# EAGLE board K-Board (EAGLE 6.1)
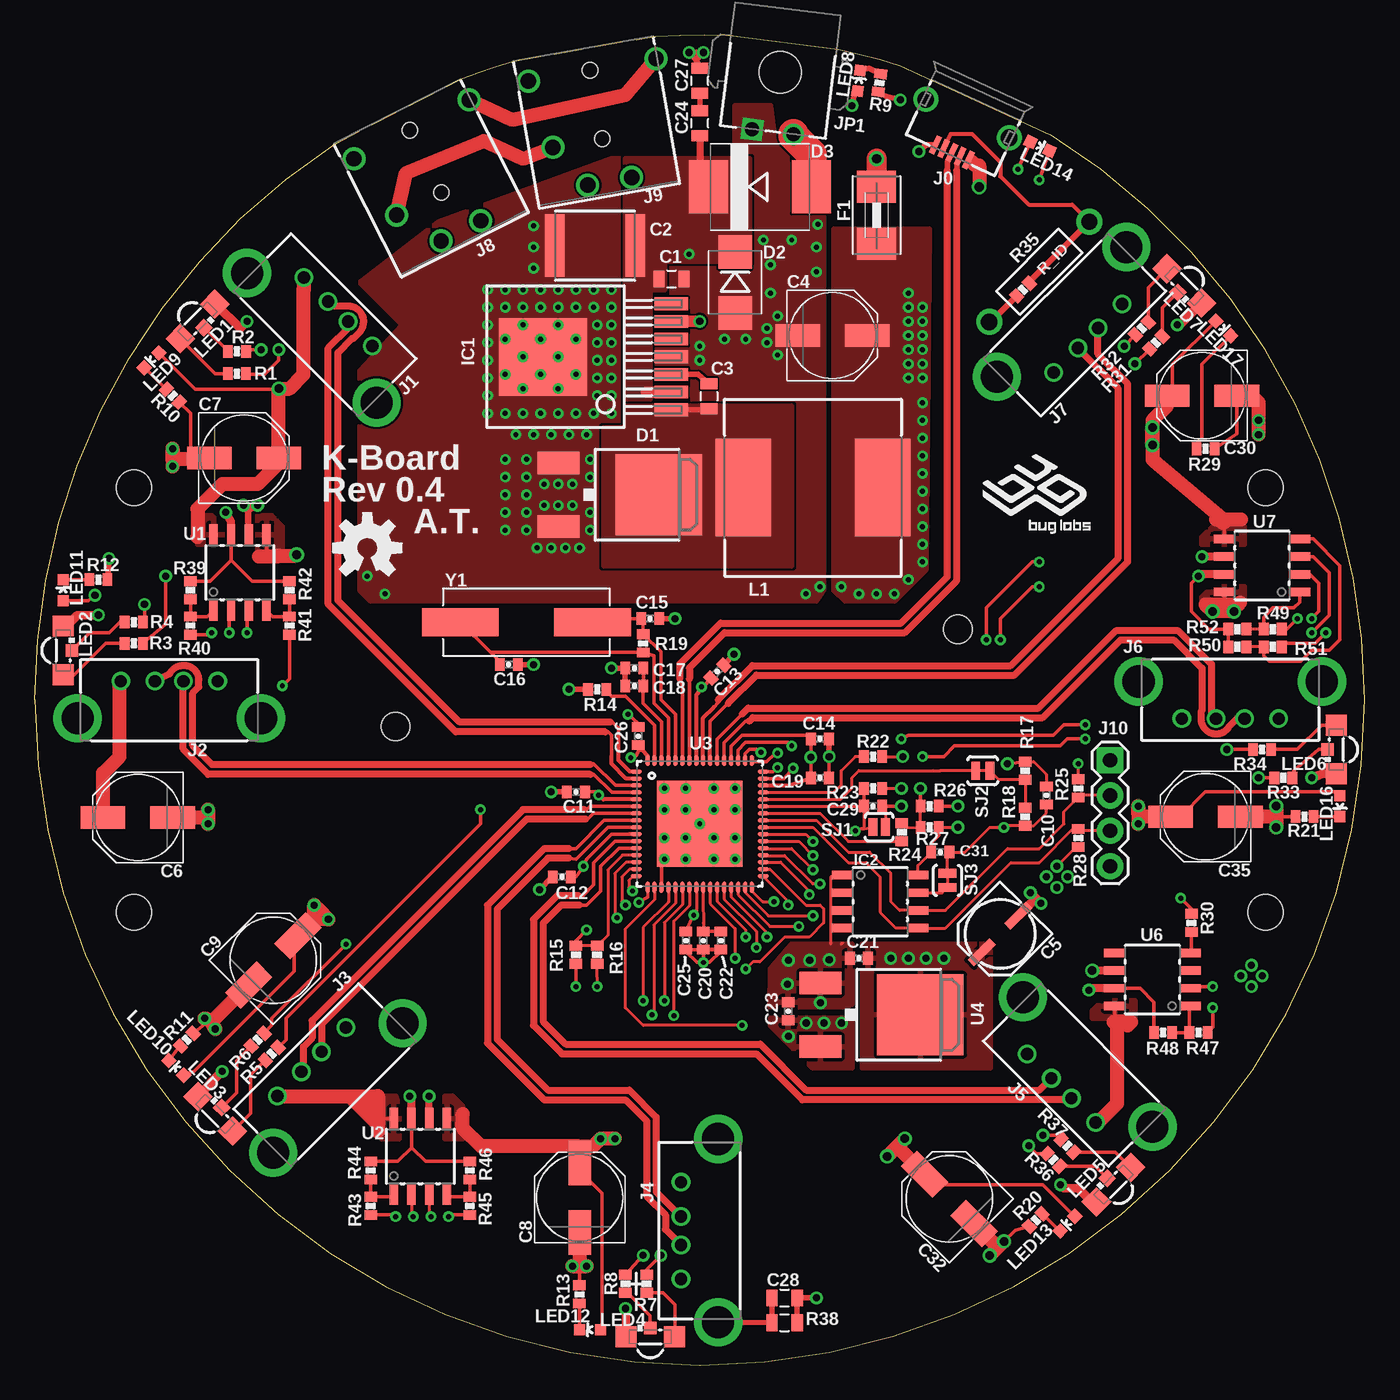
[diagram p0: board, top side]
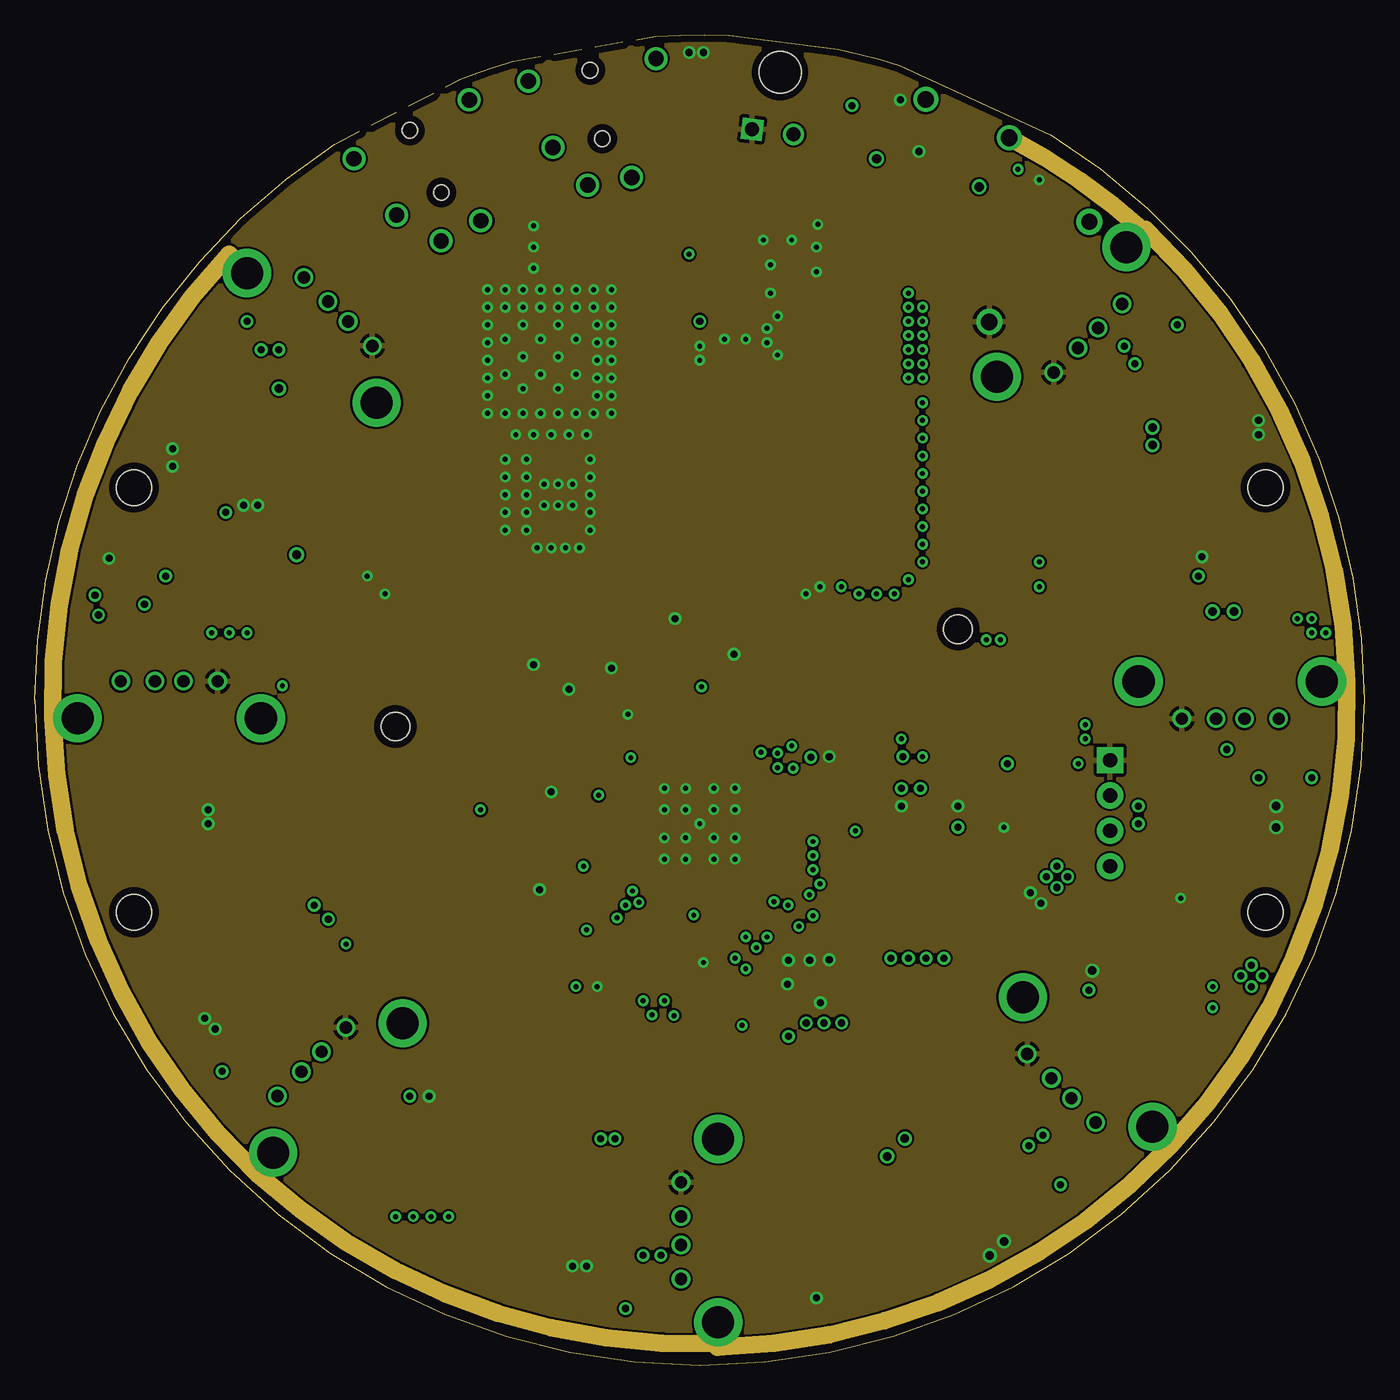
[diagram p1: board, inner layer Route2]
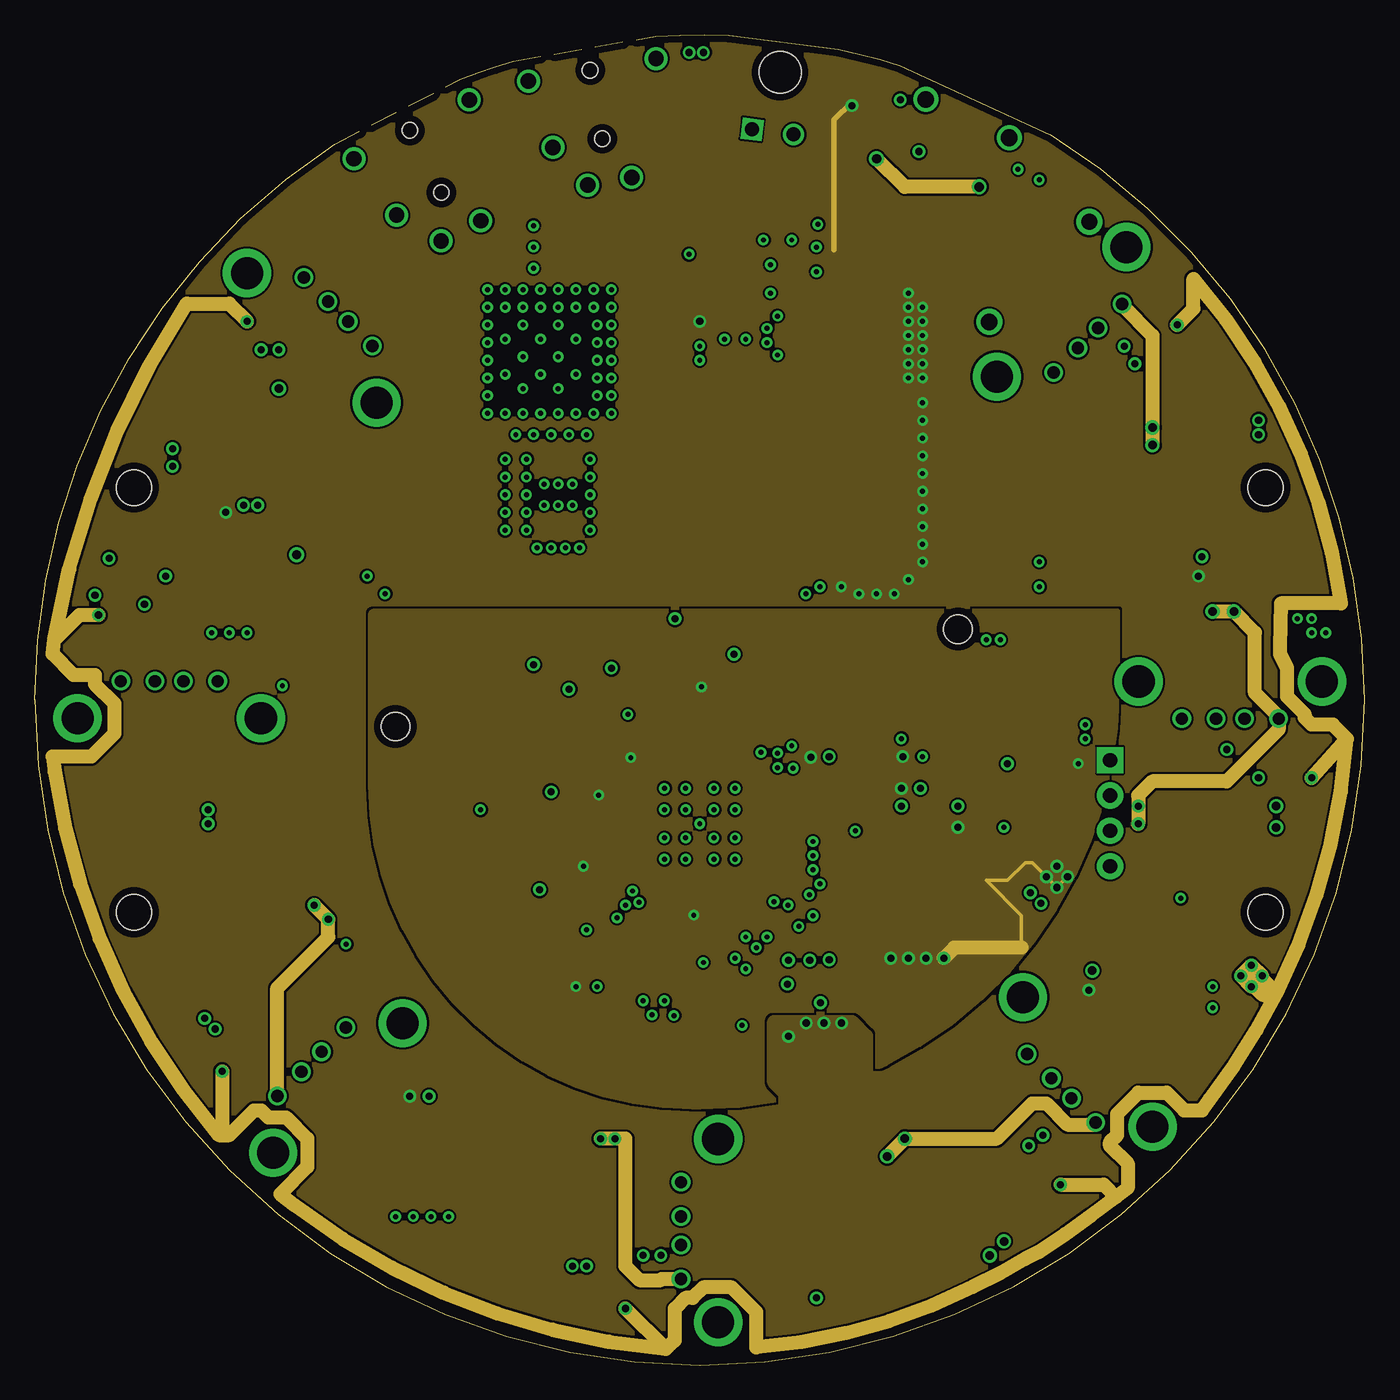
[diagram p2: board, inner layer Route15]
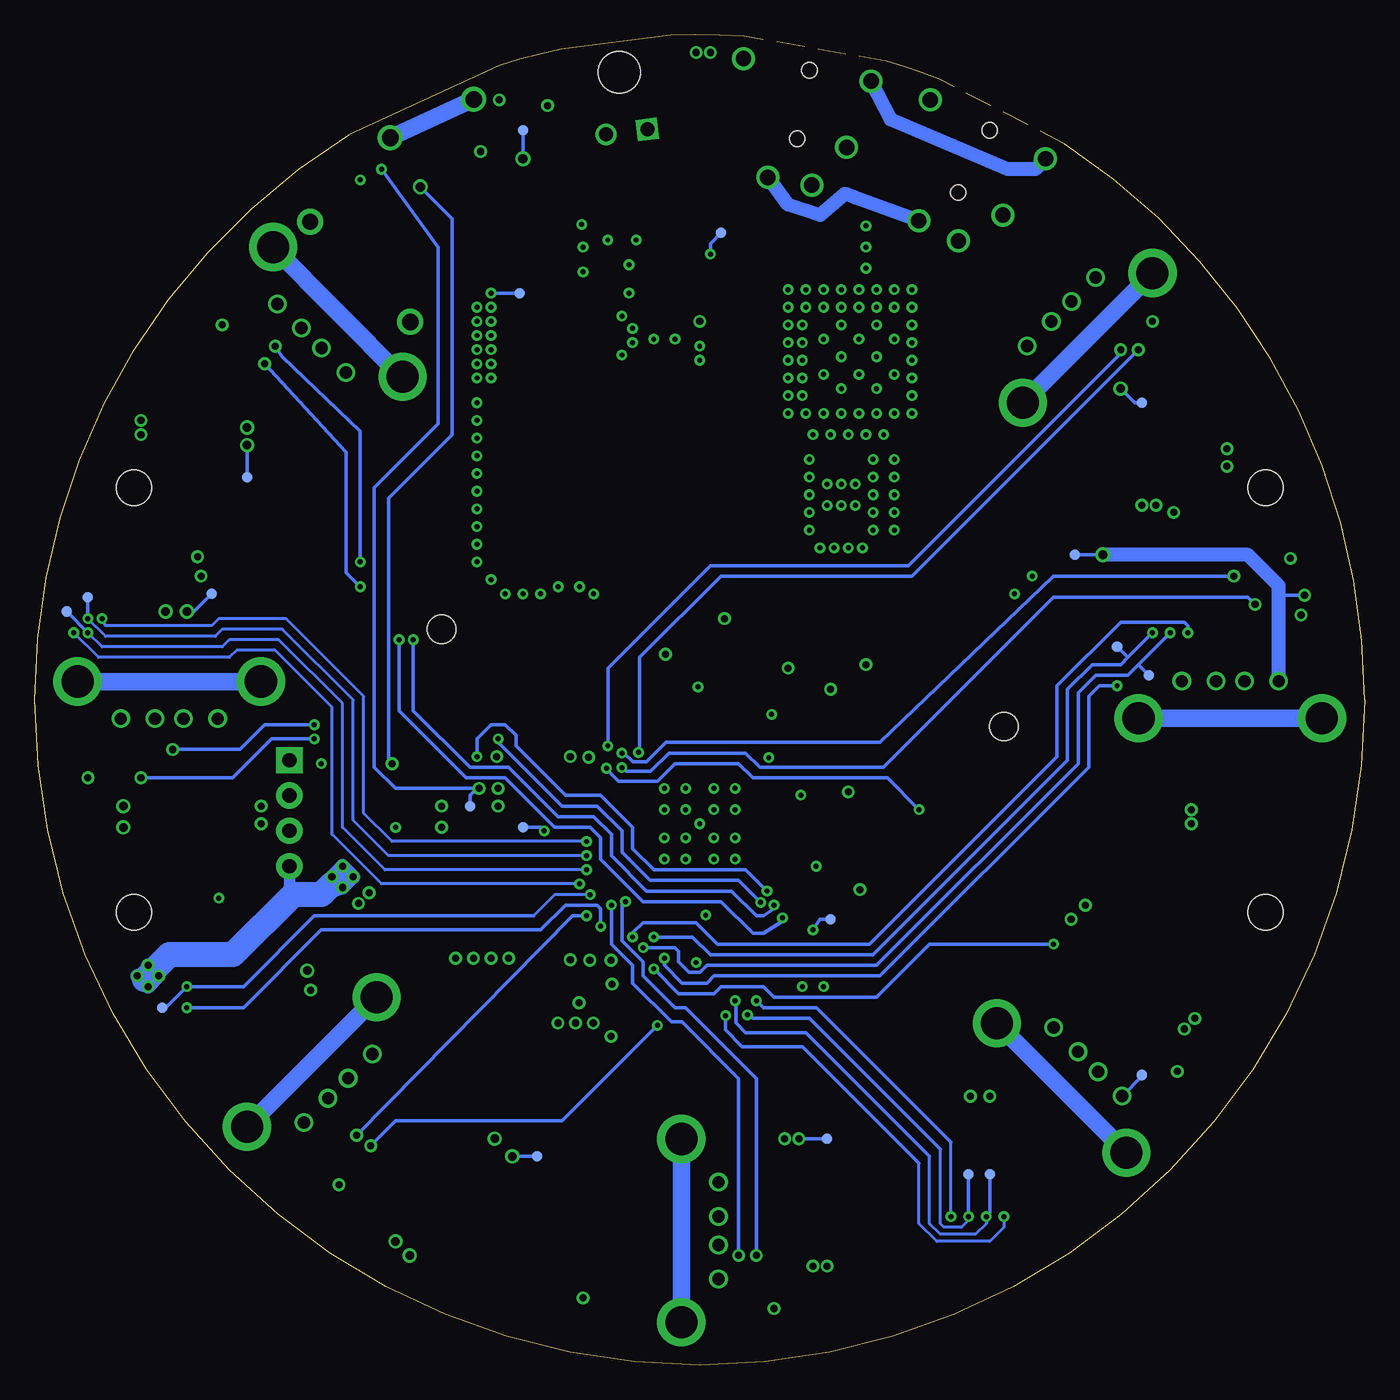
[diagram p3: board, bottom side, seen from below]

Size 95.5 x 95.5 mm. Coordinates in mm from the lower left corner, seen from the top.
Outline: 0,47.75 arc180 95.5,47.75 arc58 72.92,88.34 62.15,93.29 arc6 57.71,94.46 49.84,95.45 arc6 44.58,95.4 34.34,93.6 arc5 30.53,92.3 21.51,87.66 arc57 0,47.75
Copper layers (1+2*15+16): Top 0.0178mm / dielectric 12mil / Route2 0.0356mm / dielectric 28mil / Route15 0.0356mm / dielectric 12mil / Bottom 0.0178mm
Design rules: minimum track width 6mil, minimum drill 8mil, track to track 6mil, track to pad 6mil, pad to pad 6mil, via to via 6mil, smd to smd 6mil, copper to edge 20mil, drill to drill 16mil, minimum pad ring 8mil, minimum via ring 8mil, stop-mask expansion 3mil, vias tented up to drill 0mil, thermal gap 10mil
Holes 2.54 mm at 7.11,62.99 7.11,32.51 88.39,32.51 88.39,62.99
Holes 2.03 mm at 66.29,52.83 25.91,45.85

## Footprints (pad centres in the part's own frame; a part is rotated, then mirrored left to right if it is on the bottom)
0805 = smd 0.8 x 1.2: 1 -0.9,0; 2 0.9,0
2220 = smd 1.4 x 4.5: 1 -2.9,-0.01; 2 2.9,-0.01
PANASONIC_D = smd 3.2 x 1.6: + 2.5,0; - -2.5,0
PANASONIC_C = smd 2.2 x 0.65: + 1.9,-0.2; - -1.8,-0.2
0402-CAP = smd 0.7 x 0.9: 1 -0.65,0; 2 0.65,0
V-REG_DPACK = smd 1.6 x 3: 1 -2.28,-4.8; 3 2.28,-4.8 | smd 5.8 x 6.2: 4 0,2.38
SMB-DIODE = smd 2.4 x 2.4: A 2.2,0; C -2.2,0
SMC = smd 2.8 x 3.8: A 3.7,0; C -3.7,0
1812 = smd 2.286 x 2.794: 1 -2.046,0; 2 2.046,0
TO-263 = smd 0.91 x 2.41: 1 -3.81,0; 2 -2.54,0; 3 -1.27,0; 4 0,0; 5 1.27,0; 6 2.54,0; 7 3.81,0 | smd 5.59 x 6.35: PAD -0.02,9.22
SOIC8 = smd 0.6 x 1.55: 1 -1.905,-2.7; 2 -0.635,-2.7; 3 0.635,-2.7; 4 1.905,-2.7; 5 1.905,2.7; 6 0.635,2.7; 7 -0.635,2.7; 8 -1.905,2.7
10118193 = smd 0.4 x 1.35: 1 -1.3,2.675; 2 -0.65,2.675; 3 0,2.675; 4 0.65,2.675; 5 1.3,2.675 | drill 1.2: S1 -3.3,0; S2 3.3,0
USB-A-TH-VERT = drill 0.889: D+ 1.016,1.346; D- -1.016,1.346; GND 3.48,1.346; VBUS -3.48,1.346 | drill 2.311: S1 -6.579,-1.321; S2 6.579,-1.321
SJ-4351X = drill 1.1: 1 0,4.8; 2 5,-3.6; 3 8.1,1.6; 4 0,-4.5; 5 8.1,-1.6 | hole 1.1: 0,0; 5,0
1X04 = drill 1.016 pad 1.88 square: 1 0,0 | drill 1.016 pad 1.88: 2 2.54,0; 3 5.08,0; 4 7.62,0
2-1445055-2 = drill 1.016 square: 1 1.499,2.159 | drill 1.016: 2 -1.499,2.159 | hole 2.997: 0,-2.159
SRR1208 = smd 4 x 7: 1 -5,0; 2 5,0
LED_DUAL_3MMX1MM = smd 1.5 x 1.5: 1 -1.75,0; 3 1.75,0 | smd 0.9 x 0.9: 2 0,0.65
LED-0603 = smd 0.8 x 0.8: A 0,-0.75; C 0,0.75
0402-RES = smd 0.7 x 0.9: 1 -0.65,0; 2 0.65,0
AXIAL-0.4 = drill 1.168 pad 1.88: P$1 -5.08,0; P$2 5.08,0
SJ_2S-NO = smd 0.635 x 1.27: 1 -0.45,0; 2 0.45,0
SJ_2S-TRACE = smd 0.635 x 1.27: 1 -0.508,0; 2 0.508,0
PAD.03X.03 = smd 0.762 x 0.762: P$1 0,0
QFN-64-PAD = smd 0.8 x 0.28: 1 -4.55,3.75; 2 -4.55,3.25; 3 -4.55,2.75; 4 -4.55,2.25; 5 -4.55,1.75; 6 -4.55,1.25; 7 -4.55,0.75; 8 -4.55,0.25; 9 -4.55,-0.25; 10 -4.55,-0.75; 11 -4.55,-1.25; 12 -4.55,-1.75; 13 -4.55,-2.25; 14 -4.55,-2.75; 15 -4.55,-3.25; 16 -4.55,-3.75; 33 4.55,-3.75; 34 4.55,-3.25; 35 4.55,-2.75; 36 4.55,-2.25; 37 4.55,-1.75; 38 4.55,-1.25; 39 4.55,-0.75; 40 4.55,-0.25; 41 4.55,0.25; 42 4.55,0.75; 43 4.55,1.25; 44 4.55,1.75; 45 4.55,2.25; 46 4.55,2.75; 47 4.55,3.25; 48 4.55,3.75 | smd 0.28 x 0.8: 17 -3.75,-4.55; 18 -3.25,-4.55; 19 -2.75,-4.55; 20 -2.25,-4.55; 21 -1.75,-4.55; 22 -1.25,-4.55; 23 -0.75,-4.55; 24 -0.25,-4.55; 25 0.25,-4.55; 26 0.75,-4.55; 27 1.25,-4.55; 28 1.75,-4.55; 29 2.25,-4.55; 30 2.75,-4.55; 31 3.25,-4.55; 32 3.75,-4.55; 49 3.75,4.55; 50 3.25,4.55; 51 2.75,4.55; 52 2.25,4.55; 53 1.75,4.55; 54 1.25,4.55; 55 0.75,4.55; 56 0.25,4.55; 57 -0.25,4.55; 58 -0.75,4.55; 59 -1.25,4.55; 60 -1.75,4.55; 61 -2.25,4.55; 62 -2.75,4.55; 63 -3.25,4.55; 64 -3.75,4.55 | smd 6.15 x 6.15: P$1 0,0
HC49USX = smd 5.5 x 2: P$1 4.75,0; P$2 -4.75,0

## Placement (x,y rotation side)
C1  GRM21BR71H105KA  [0805]  45.72,77.98 0 top
C2  C5750X7S2A106M  [2220]  40.23,80.37 180 top
C3  C0805C103K5RACTU  [0805]  48.41,69.55 270 top
C4  150u  [PANASONIC_D]  57.28,73.91 0 top
C5  33u  [PANASONIC_C]  69.49,30.84 225 top
C6  100u  [PANASONIC_D]  7.4,39.32 180 top
C7  100u  [PANASONIC_D]  15.03,65.12 0 top
C8  100u  [PANASONIC_D]  39.13,12.02 90 top
C9  100u  [PANASONIC_D]  17.12,29.06 45 top
C10  0.1  [0402-CAP]  72.64,40.89 90 top
C11  0.1  [0402-CAP]  38.86,41.15 180 top
C12  0.1  [0402-CAP]  37.85,35.05 180 top
C13  0.1  [0402-CAP]  49.02,49.78 45 top
C14  0.1  [0402-CAP]  56.39,44.96 0 top
C15  18p  [0402-CAP]  44.2,53.59 0 top
C16  18p  [0402-CAP]  34.04,50.29 180 top
C17  1  [0402-CAP]  43.05,50.04 180 top
C18  0.1  [0402-CAP]  43.05,48.77 180 top
C19  0.1  [0402-CAP]  56.39,42.16 0 top
C20  0.1  [0402-CAP]  48.01,30.48 270 top
C21  22n  [0402-CAP]  59.18,29.21 180 top
C22  1  [0402-CAP]  49.28,30.48 270 top
C23  0.1  [0402-CAP]  54.1,25.4 270 top
C24  0.47u  [0805]  47.75,89.15 90 top
C25  0.1  [0402-CAP]  46.76,30.48 270 top
C26  0.1  [0402-CAP]  43.33,45.16 90 top
C27  0.47  [0805]  47.75,92.2 90 top
C28  4.7n  [0805]  53.85,4.83 0 top
C29  0.1  [0402-CAP]  60.2,40.13 0 top
C30  100u  [PANASONIC_D]  83.82,69.6 180 top
C31  0.1  [0402-CAP]  65.02,36.83 0 top
C32  100u  [PANASONIC_D]  65.68,11.94 135 top
C35  100u  [PANASONIC_D]  84.07,39.37 180 top
D1  50WQ10FNPBF  [V-REG_DPACK]  42.42,62.48 270 top
D2  SMBJ36CA  [SMB-DIODE]  50.29,77.72 270 top
D3  MBRS540T3G  [SMC]  52.07,84.58 0 top
DRILEGEND  [DRILEGEND]  118.67,39.52 0 top  (outside the outline)
F1  MF-MSMF110/16-2  [1812]  60.45,82.55 270 top
IC1  LM22678  [TO-263]  45.72,72.39 90 top
IC2  ATMEL-AT24C02B-SS  [SOIC8]  60.71,33.27 270 top
J0  USB_MINIB_SHIELD-10118193  [10118193]  66.98,89.49 155.3 top
J1  USB-A-S-RA-VERT  [USB-A-TH-VERT]  20.83,74.68 315 top
J2  USB-A-S-RA-VERT  [USB-A-TH-VERT]  9.65,47.75 0 top
J3  USB-A-S-RA-VERT  [USB-A-TH-VERT]  20.83,20.83 45 top
J4  USB-A-S-RA-VERT  [USB-A-TH-VERT]  47.75,9.65 90 top
J5  USB-A-S-RA-VERT  [USB-A-TH-VERT]  74.68,20.83 135 top
J6  USB-A-S-RA-VERT  [USB-A-TH-VERT]  85.85,47.75 180 top
J7  USB-A-S-RA-VERT  [USB-A-TH-VERT]  74.68,74.68 225 top
J8  Audio INPUT  [SJ-4351X]  26.92,88.65 297 top
J9  Audio OUTPUT  [SJ-4351X]  39.88,92.96 280 top
J10  IIC  [1X04]  77.22,43.43 270 top
JP1  Power  [2-1445055-2]  53.26,90.68 173 top
L1  SRR1208-6R5ML  [SRR1208]  55.88,62.99 0 top
LED1  LED_2X_COMMON_ANODE  [LED_DUAL_3MMX1MM]  11.68,74.93 225 top
LED2  LED_2X_COMMON_ANODE  [LED_DUAL_3MMX1MM]  2.03,51.31 270 top
LED3  LED_2X_COMMON_ANODE  [LED_DUAL_3MMX1MM]  12.95,18.03 315 top
LED4  LED_2X_COMMON_ANODE  [LED_DUAL_3MMX1MM]  44.2,2.03 0 top
LED5  LED_2X_COMMON_ANODE  [LED_DUAL_3MMX1MM]  77.47,12.95 45 top
LED6  LED_2X_COMMON_ANODE  [LED_DUAL_3MMX1MM]  93.47,44.2 90 top
LED7  LED_2X_COMMON_ANODE  [LED_DUAL_3MMX1MM]  82.55,77.47 135 top
LED8  [LED-0603]  59.18,92.2 352 top
LED9  [LED-0603]  8.38,72.14 135 top
LED10  [LED-0603]  10.16,21.34 45 top
LED11  [LED-0603]  2.03,55.63 0 top
LED12  [LED-0603]  39.88,2.54 90 top
LED13  [LED-0603]  74.17,10.16 135 top
LED14  [LED-0603]  72.19,87.5 245 top
LED16  [LED-0603]  93.73,40.13 180 top
LED17  [LED-0603]  85.34,74.42 225 top
R1  110  [0402-RES]  14.51,71.17 180 top
R2  110  [0402-RES]  14.52,72.77 0 top
R3  110  [0402-RES]  7.11,51.82 180 top
R4  110  [0402-RES]  7.11,53.34 0 top
R5  110  [0402-RES]  17.02,22.35 225 top
R6  110  [0402-RES]  16,23.37 45 top
R7  110  [0402-RES]  43.94,5.84 270 top
R8  110  [0402-RES]  42.42,5.84 90 top
R9  330  [0402-RES]  60.66,92.05 262 top
R10  330  [0402-RES]  9.91,69.6 315 top
R11  330  [0402-RES]  10.92,23.37 45 top
R12  330  [0402-RES]  4.57,56.39 0 top
R13  330  [0402-RES]  39.12,5.08 90 top
R14  12k-1%  [0402-RES]  40.39,48.51 180 top
R15  10k  [0402-RES]  38.86,29.46 270 top
R16  DNP  [0402-RES]  40.39,29.46 90 top
R17  100k  [0402-RES]  71.12,42.67 270 top
R18  100k  [0402-RES]  71.12,39.37 90 top
R19  1M  [0402-RES]  43.69,51.82 90 top
R20  330  [0402-RES]  71.88,10.41 225 top
R21  330  [0402-RES]  91.19,39.37 180 top
R22  10k  [0402-RES]  60.2,43.69 180 top
R23  100k  [0402-RES]  60.2,41.4 180 top
R24  330  [0402-RES]  62.26,38.25 270 top
R25  10k  [0402-RES]  74.93,41.4 90 top
R26  100k  [0402-RES]  64.26,40.13 180 top
R27  DNP  [0402-RES]  64.26,38.61 0 top
R28  10k  [0402-RES]  74.93,37.85 270 top
R29  330  [0402-RES]  84.07,65.79 0 top
R30  10k  [0402-RES]  83.06,31.75 270 top
R31  110  [0402-RES]  80.52,73.41 225 top
R32  110  [0402-RES]  79.5,74.42 45 top
R33  110  [0402-RES]  89.66,42.16 180 top
R34  110  [0402-RES]  88.14,44.2 0 top
R35  124k  [0402-RES]  70.97,77.22 225 top
R35B  R_ID  [AXIAL-0.4]  72.14,78.49 225 top
R36  110  [0402-RES]  73.15,14.73 135 top
R37  110  [0402-RES]  74.17,15.75 315 top
R38  1M  [0805]  53.85,3.05 0 top
R39  0  [0402-RES]  11.18,55.63 90 top
R40  DNP  [0402-RES]  11.18,53.09 270 top
R41  DNP  [0402-RES]  18.29,53.09 90 top
R42  0  [0402-RES]  18.29,55.63 270 top
R43  DNP  [0402-RES]  24.13,11.43 270 top
R44  0  [0402-RES]  24.13,13.97 90 top
R45  DNP  [0402-RES]  31.24,11.43 90 top
R46  0  [0402-RES]  31.24,13.97 270 top
R47  DNP  [0402-RES]  83.57,23.88 0 top
R48  0  [0402-RES]  81.03,23.88 180 top
R49  DNP  [0402-RES]  88.9,52.83 0 top
R50  0  [0402-RES]  86.36,52.83 180 top
R51  DNP  [0402-RES]  88.9,51.56 180 top
R52  0  [0402-RES]  86.36,51.56 0 top
SJ1  OPEN  [SJ_2S-NO]  60.64,38.62 180 top
SJ2  CLOSED  [SJ_2S-TRACE]  68.07,42.67 180 top
SJ3  CLOSED  [SJ_2S-TRACE]  65.53,34.8 270 top
SYM1  [OSHW-LOGO-M]  23.88,58.67 0 top
SYM2  [BUG_LOGO_SM]  68.07,59.69 0 top
TP1  RESET  [PAD.03X.03]  60.45,38.61 0 bottom
TP2  +5V  [PAD.03X.03]  60.71,76.96 0 bottom
TP3  +12V  [PAD.03X.03]  46.23,81.28 0 bottom
TP4  VBUS  [PAD.03X.03]  60.45,88.65 0 bottom
TP5  CFG1  [PAD.03X.03]  64.26,40.13 0 bottom
TP6  CFG2  [PAD.03X.03]  38.35,32 0 bottom
TP7  ERR0  [PAD.03X.03]  15.49,49.53 0 bottom
TP8  PWR0  [PAD.03X.03]  16,69.09 0 bottom
TP9  ERR1  [PAD.03X.03]  17.78,51.56 0 bottom
TP10  PWR1  [PAD.03X.03]  20.83,58.17 0 bottom
TP11  ERR2  [PAD.03X.03]  26.92,13.72 90 bottom
TP12  ERR3  [PAD.03X.03]  28.45,13.72 90 bottom
TP13  PWR2  [PAD.03X.03]  16,20.83 90 bottom
TP14  PWR3  [PAD.03X.03]  38.61,16.26 90 bottom
TP15  ERR4  [PAD.03X.03]  86.36,25.65 0 bottom
TP16  PWR4  [PAD.03X.03]  59.44,14.99 0 bottom
TP17  ERR5  [PAD.03X.03]  91.69,55.12 0 bottom
TP18  ERR6  [PAD.03X.03]  93.22,54.1 0 bottom
TP19  PWR5  [PAD.03X.03]  82.8,55.37 0 bottom
TP20  PWR6  [PAD.03X.03]  80.26,63.75 0 bottom
U1  [SOIC8]  14.73,56.9 0 top
U2  [SOIC8]  27.69,14.99 0 top
U3  USB2517  [QFN-64-PAD]  47.75,38.86 0 top
U4  TLE4284DV33  [V-REG_DPACK]  61.21,25.15 270 top
U6  [SOIC8]  80.26,27.69 90 top
U7  [SOIC8]  88.14,57.4 90 top
U$9  [A4L-LOC]  -26.87,-32.11 0 top  (outside the outline)
Y1  24M  [HC49USX]  35.31,53.34 0 top

## Library data of the parts
C1-C32 C35 D1 D2 IC1 IC2 J0 J1-J9 JP1 L1 LED1-LED14 LED16 LED17 R1-R35 R35B R36-R52 SYM2 TP1-TP20 U1-U4 U6 U7 Y1 = BUG
D3 = SparkFun-DiscreteSemi
DRILEGEND = drilegend
F1 = adafruit
J10 = SparkFun-Connectors
SJ1-SJ3 = SparkFun-Passives
SYM1 = SparkFun-Aesthetics
U$9 = frames

## Nets
3.3V: C5.+ C11.1 C12.1 C13.1 C14.1 C19.1 C21.1 C25.1 C26.1 C31.1 IC2.8 J10.4 LED1.1 LED2.1 LED3.1 LED4.1 LED5.1 LED6.1 LED7.1 R15.2 R22.1 R23.1 R25.2 R27.2 R28.2 U3.5 U3.10 U3.24 U3.46 U3.52 U3.57 U3.64 U4.4
5V: C4.+ C23.2 F1.2 IC1.6 L1.2 LED8.A R39.2 R42.1 R44.2 R46.1 R48.2 R50.2 R52.1 TP2.P$1 U1.7 U2.7 U4.3 U6.7 U7.7
+12V: C1.1 C2.1 C24.1 D2.C D3.C IC1.2 TP3.P$1
ENB3: R45.2 R46.2 U2.4
ENB6: R51.2 R52.2 U7.4
GND: C1.2 C2.2 C4.- C5.- C6.- C7.- C8.- C9.- C10.1 C11.2 C12.2 C13.2 C14.2 C15.2 C16.1 C17.2 C18.2 C19.2 C20.2 C21.2 C22.2 C23.1 C25.2 C26.2 C27.2 C28.2 C29.2 C30.- C31.2 C32.- C35.- D1.1 D1.3 D2.A IC1.4 IC1.PAD IC2.1 IC2.2 IC2.3 IC2.4 J0.5 J1.GND J2.GND J3.GND J4.GND J5.GND J6.GND J7.GND J10.1 JP1.1 LED14.C R9.2 R10.2 R11.2 R12.2 R13.2 R14.2 R16.1 R18.1 R20.2 R21.2 R26.1 R29.2 R30.1 R35.2 R35B.P$2 R38.2 SJ1.1 SJ3.1 U1.6 U2.6 U3.19 U3.P$1 U4.1 U6.6 U7.6
J7: J7.D+ U3.56
N$1: C20.1 C22.1 U3.25
N$2: R22.2 U3.45
N$3: C17.1 C18.1 U3.62
N$4: C29.1 R23.2 SJ1.2 TP1.P$1 U3.43
N$5: C15.1 R19.2 U3.60 Y1.P$1
N$6: C16.2 R19.1 U3.61 Y1.P$2
N$7: R30.2 U6.4
N$8: R17.2 R18.2 SJ2.1
N$9: J1.D- U3.1
N$10: SJ2.2 U3.44
N$11: C10.2 F1.1 J0.1 R17.1 TP4.P$1
N$12: R14.1 U3.63
N$13: J1.D+ U3.2
N$14: R2.2 U3.50
N$15: R1.1 U3.51
N$16: LED1.3 R1.2
N$17: LED1.2 R2.1
N$18: TP7.P$1 U1.2 U3.28
N$19: R40.2 U3.29
N$20: C7.+ J1.VBUS LED9.A TP8.P$1 U1.8
N$21: R41.1 U3.26
N$22: TP9.P$1 U1.3 U3.27
N$23: J2.D- U3.3
N$24: J2.D+ U3.4
N$25: C6.+ J2.VBUS LED11.A TP10.P$1 U1.5
N$26: LED2.3 R3.2
N$27: R4.2 U3.48
N$28: R3.1 U3.49
N$29: LED2.2 R4.1
N$30: J6.D- U3.53
N$31: J3.D- U3.6
N$32: J3.D+ U3.7
N$33: R6.2 U3.34
N$34: R5.1 U3.47
N$35: LED3.3 R5.2
N$36: LED3.2 R6.1
N$37: LED11.C R12.1
N$38: J4.D- U3.8
N$39: J4.D+ U3.9
N$40: C8.+ J4.VBUS LED12.A TP14.P$1 U2.5
N$41: LED4.3 R7.2
N$42: R8.2 U3.32
N$43: R7.1 U3.33
N$44: LED4.2 R8.1
N$45: TP11.P$1 U2.2 U3.22
N$46: R43.2 U3.23
N$47: D3.A JP1.2
N$48: TP12.P$1 U2.3 U3.21
N$49: J5.D- U3.11
N$50: J5.D+ U3.12
N$51: R36.2 U3.18
N$52: R37.1 U3.31
N$53: LED5.3 R37.2
N$54: LED5.2 R36.1
N$55: C32.+ J5.VBUS LED13.A TP16.P$1 U6.8
N$56: J6.D+ U3.54
N$57: R33.2 U3.16
N$58: R34.1 U3.17
N$59: LED6.3 R34.2
N$60: LED6.2 R33.1
N$61: C35.+ J6.VBUS LED16.A TP19.P$1 U7.8
N$62: J7.D- U3.55
N$63: J8.3 J9.3
N$64: C30.+ J7.VBUS LED17.A TP20.P$1 U7.5
N$65: LED7.3 R32.2
N$66: R31.2 U3.14
N$67: R32.1 U3.15
N$68: LED7.2 R31.1
N$69: TP15.P$1 U3.35 U6.2
N$70: R47.2 U3.30
N$71: TP17.P$1 U3.38 U7.2
N$72: R49.2 U3.39
N$74: TP18.P$1 U3.37 U7.3
N$75: R15.1 R16.2 TP6.P$1 U3.13
N$76: LED14.A R24.1 R26.2 R27.1 TP5.P$1
N$77: R24.2 U3.42
N$78: IC2.6 J10.2 R25.1 U3.41
N$79: IC2.5 J10.3 R28.1 U3.40
N$80: J8.2 J9.2
N$81: R39.1 R40.1 U1.1
N$82: C3.1 IC1.3
N$83: J8.4 J9.4
N$84: J8.1 J9.1
N$85: LED8.C R9.1
N$86: LED9.C R10.1
N$87: C9.+ J3.VBUS LED10.A TP13.P$1 U2.8
N$88: LED10.C R11.1
N$89: C24.2 C27.1
N$90: LED12.C R13.1
N$91: LED17.C R29.1
N$92: LED16.C R21.1
N$93: LED13.C R20.1
N$94: J0.4 R35.1 R35B.P$1
N$95: R41.2 R42.2 U1.4
N$96: R43.1 R44.1 U2.1
N$97: R45.1 U3.20
N$98: R47.1 R48.1 U6.1
N$99: R49.1 R50.1 U7.1
N$100: R51.1 U3.36
N$101: IC2.7 SJ3.2
PE: C28.1 J0.S1 J0.S2 J1.S1 J1.S2 J2.S1 J2.S2 J3.S1 J3.S2 J4.S1 J4.S2 J5.S1 J5.S2 J6.S1 J6.S2 J7.S1 J7.S2 R38.1
SW: C3.2 D1.4 IC1.1 L1.1
UP_DM: J0.2 U3.58
UP_DP: J0.3 U3.59

## Tracks (layer width: path | path; a pad name or v marks a point on that pad's centre or on a via)
3.3V  (via drill 0.36, 0.51)
  Top 0.203: U3.24 47.5,32.51 | 47.17,32.09 C25.1 v47.32,32.31 | R22.1 v62.33,43.69 | R23.1 v62.23,41.4 | v66.29,38.61 R27.2 64.91,37.99 64.37,37.45 C31.1 63.41,35.86 IC2.8 | R25.2 v74.93,43.18 | R28.2 74.79,37.2 v73.41,35.81
  Top 0.254: 40.81,40.61 40.27,41.15 C11.1 | 42.68,38.11 42.67,38.1 41.4,38.1 39.62,36.32 v39.4,35.81 38.86,35.05 C12.1 38.61,35.05 | U3.52 50,44.41 50.8,45.21 55.48,45.21 C14.1 55.73,44.95 v55.73,43.64 55.74,43.63 C19.1 | 47.5,32.51 47.17,32.09 | U3.64 44,43.76 43.61,44.15 43.38,44.15 43.18,43.76 v42.8,43.61 | U3.5 40.8,40.61 v40.49,40.92 | R15.2 v38.86,27.18 | 47.5,48.11 v47.88,48.69
  Top 0.279: U3.5 40.81,40.61 | U3.46 54.17,41.61 C19.1 | U3.57 47.5,48.11 C13.1 | U3.64 44,43.74 C26.1 | U3.10 42.68,38.11
  Top 0.61: LED1.1 12.99,76.17 14.73,74.42 v15.24,74.93 | LED2.1 2.26,53.06 3.05,53.85 v4.57,53.85 | LED3.1 11.72,19.34 v13.46,21.08 | LED4.1 42.45,4.04 v42.42,4.06 | LED5.1 75.91,11.72 74.93,12.7 73.91,12.7 v73.66,12.95 | LED6.1 92.48,42.45 v91.69,42.16 | LED7.1 82.23,74.68 v82.04,74.68
  Route15 0.254: 70.87,29.97 70.87,32.26 68.33,34.8 69.85,34.8 71.12,36.07 71.63,36.07 v72.64,35.05 v73.41,34.29 v74.17,35.05
  Route15 1.016: 1.4,52.05 1.27,51.05 2.79,49.53 4.32,49.53 4.32,48.9 5.71,47.5 5.71,45.34 4.06,43.69 1.27,43.69 1.42,42.62 arc32 13.21,16.51 | 1.4,52.05 arc-24 10.92,76.2 13.97,76.2 v15.24,74.93 | 13.21,16.51 13.97,16.51 15.75,18.29 16.26,18.29 16.76,17.78 18.03,17.78 19.56,16.26 19.56,14.22 17.63,12.27 18.69,11.46 arc32 45.31,1.17 | 77.65,12.07 78.49,12.7 78.49,14.48 77.22,15.75 77.22,16 77.72,16.51 77.72,18.03 79.25,19.56 81.28,19.56 82.55,18.29 83.82,18.29 84.38,19.1 arc11 89.15,26.67 | 77.65,12.07 arc-3 72.14,8.13 71.12,7.62 69.34,6.6 67.36,5.61 arc-22 51.82,1.27 51.82,3.81 50.04,5.59 48.01,5.59 47.24,4.83 46.74,4.83 45.97,4.06 45.97,1.78 45.52,1.4 45.54,1.4 45.31,1.17 | 94.23,44.96 93.22,45.97 91.69,45.97 91.19,46.48 91.19,46.74 89.92,48.01 89.92,50.04 89.41,51.05 89.41,51.56 89.48,54.69 93.8,54.69 arc33 83.21,77.98 83.21,75.84 v82.04,74.68 | 70.87,29.97 66.04,29.97 v65.28,29.21 | v4.57,53.85 3.2,53.85 1.4,52.05 | v13.46,21.08 13.46,16.76 13.21,16.51 | v42.42,4.06 45.31,1.17 | v73.66,12.95 76.76,12.95 77.65,12.07 | v91.69,42.16 94.23,44.96 | v87.38,27.18 v86.61,27.94 v87.38,28.7 v88.14,27.94 87.38,27.94 | v87.38,27.18 88.65,27.18 89.15,26.67 | v87.38,27.18 87.88,27.18 88.65,26.42 | 89.15,26.67 arc22 94.23,44.96
  Route15 1.778: 87.38,27.94 88.39,26.92
  Bottom 0.813: J10.4 77.22,34.04 76.96,33.78
  Bottom 1.016: v73.41,35.81 v74.17,35.05 v73.41,34.29 v72.64,35.05 v73.41,35.81 | v73.41,35.81 73.41,35.05 73.91,34.54 | 87.63,27.69 87.88,27.69 v88.14,27.94 v87.38,27.18 v86.61,27.94 v87.38,28.7
  Bottom 1.778: 73.91,34.54 74.17,34.54 74.93,33.78 76.96,33.78 81.28,29.46 85.85,29.46 87.63,27.69
  other vias: 61.47,29.21 62.74,29.21 64.01,29.21
  pour Route15 (rank 3): 66.8,42.16 66.8,41.15 arc-180
  pour Top: 59.44,21.34 68.63,21.34 68.63,30.23 59.44,30.23
  pour Route15 (rank 3): 24.38,54.1 77.72,54.1 77.72,48.51 arc-90 47.75,18.54 47.24,18.54 arc-90 24.13,41.66 24.13,53.85 arc-90
5V  (via drill 0.36, 0.51)
  Top 0.254: U1.7 14.1,57.79 | 14.1,57.79 12.59,56.28 R39.2 | R42.1 15.61,56.28 14.1,57.79 | R44.2 26.05,14.62 27.05,15.62 | U2.7 27.05,15.62 | R46.1 28.05,14.62 27.05,15.62 | R48.2 80.38,26.05 79.38,27.05 U6.7 | R52.1 R50.2 84.33,52.83 83.06,54.1 83.06,56.13 v83.57,56.64
  Top 0.406: LED8.A 58.82,91.08 v58.67,90.42
  Top 0.559: U1.7 14.1,60.58 v13.72,61.21 | U2.7 27.05,19.18 v26.92,19.3 | U6.7 75.82,27.05 v75.69,26.92 | U7.7 83.69,56.77 v83.57,56.64
  Top 0.813: IC1.6 v47.75,74.93
  Route15 0.406: v58.67,90.42 58.67,90.68 57.4,89.41 57.4,80.09
  Bottom 0.254: v62.74,76.96 TP2.P$1
  other vias: 55.4,24.56 56.67,24.56 57.94,24.56 54.13,23.6 62.74,75.95 62.74,74.93 62.74,73.91 62.74,72.9 62.74,71.88 62.74,70.87 63.75,75.95 63.75,74.93 63.75,73.91 63.75,72.9 63.75,71.88 63.75,70.87 63.75,69.09 63.75,67.82 63.75,66.55 63.75,65.28 63.75,64.01 63.75,62.74 63.75,61.47 63.75,60.2 63.75,58.93 63.75,57.66 62.74,56.39 61.72,55.37 60.45,55.37 59.18,55.37 57.91,55.88
  pour Top (rank 4, no thermals): 57.4,55.63 58.17,54.86 61.72,54.86 64.01,57.15 64.26,81.53 57.4,81.53
  pour Route15 (rank 4): 0,48.77 0,49.02 arc-180 95.5,48.77 arc1 95.5,48.51 arc-181
  pour Top: 55.88,21.34 58.67,21.34 58.67,24.89 52.83,24.89 52.83,24.38
  pour Route15 (rank 2): 53.09,24.64 58.67,24.64 59.69,23.62 59.69,20.07 58.17,18.54 54.86,18.54 53.09,20.32
+12V  (via drill 0.36)
  Top 0.508: C24.1 47.75,84.47 D3.C
  Top 0.813: IC1.2 43.94,69.85
  Bottom 0.254: v46.99,79.76 46.99,80.52 TP3.P$1
  pour Top (rank 2, no thermals): 44.2,77.22 44.2,69.34 42.42,69.34 42.42,86.61 51.31,86.61 51.31,79.25 45.21,79.25 45.21,77.22
ENB3
  Top 0.254: U2.4 29.8,12.08 R45.2 R46.2
ENB6
  Top 0.203: R51.2 R52.2
  Top 0.254: U7.4 91.82,59.31 93.73,57.4 93.73,52.07 92.96,51.31 91.69,51.31 90.93,50.55 88.65,50.55 88.25,50.94 R51.2
GND  (via drill 0.36, 0.51, 0.61)
  Top 0.203: 40.4,26.91 R16.1 | C29.2 61.1,39.91 SJ1.1 | C10.1 72.64,39.62 71.74,38.72 R18.1 69.96,38.72 v69.6,38.61 68.58,38.61 66.8,36.83 C31.2 65.53,36.69 SJ3.1 | 58.01,30.32 57.91,30.23 | IC2.1 57.53,35.18 57.4,35.05 57.15,35.05 57.15,34.04 | 57.15,34.04 57.15,32.51 | 57.15,32.51 57.15,31.5 | 57.15,31.5 57.15,30.23 | IC2.2 57.28,33.91 57.15,34.04 | IC2.3 57.28,32.64 57.15,32.51 | IC2.4 57.28,31.37 57.15,31.5
  Top 0.254: R10.2 | R10.2 11.18,68.33 11.18,65.07 | 13.67,25.61 R11.2 | R13.2 39.12,7.11 | R20.2 70.41,9.7 v69.6,8.89 | R21.2 89.15,39.37 | R29.2 86.32,66.87 C30.- | 48.01,29.85 48.02,29.83 C22.2 C20.2 C25.2 46.76,29.69 47.55,28.91 v48.01,28.91 | v48.01,28.91 48.01,29.85 | 48.01,29.85 49.25,29.85 49.28,29.87 49.28,29.72 48.46,28.91 v48.01,28.91 | 40.4,26.91 v40.39,27.18 | U3.19 45,36.11 v46.74,37.85 U3.P$1 | C19.2 C14.2 | R26.1 v66.29,40.13 | C29.2 v62.23,40.13 | 42.4,50.02 C17.2 | C26.2 43.33,46.08 v42.6,46.71 | R30.1 83.06,32.77 v82.3,33.53 | LED14.C v72.14,85.09
  Top 0.406: R12.2 v5.33,57.91 | U1.6 15.37,61.34 v16,61.72 v14.99,61.72 14.86,61.72 15.29,61.29 15.29,60.5 15.32,60.48 | C12.2 37.16,35.05 v36.25,34.14 | C11.2 v37.08,41.15 | R14.2 v38.35,48.51 | C14.2 v57.05,43.69 | C27.2 47.5,93.73 | 47.5,93.73 v46.99,94.23 v48.01,94.23 47.5,93.73 | R9.2 61.12,91.1 v62.15,90.83 | C18.2 42.4,50.02 C17.2 | C17.2 v41.4,50.04 | C15.2 v45.97,53.59 | C16.1 v35.81,50.29 | C13.2 49.48,50.29 v50.22,51.03 | 11.48,65.02 12.53,65.02 C7.- | C9.- 15.35,27.25 14.43,26.32 14.38,26.32 14.36,26.29 | R38.2 C28.2 v56.13,4.83 | J0.5 63.98,87.6 v63.5,87.12 | R35B.P$2 68.65,74.89 R35.2
  Top 0.508: U2.6 v28.32,19.3
  Top 0.559: U6.6 v75.95,28.32 | U7.6 v83.82,58.04
  Top 0.61: C5.- 71.88,33.53 v71.5,33.91 v72.26,33.15
  Top 1.016: 14.39,26.33 14.36,26.29 13.67,25.61 12.7,24.64 | v12.95,24.13 12.7,24.64 | 12.7,24.64 v12.19,24.89 | v39.62,7.11 39.12,7.11 v38.61,7.11 38.86,7.11 39.13,7.38 C8.- | v69.6,8.89 69.09,8.38 | 69.09,8.38 v68.58,7.87 | v89.15,40.13 89.15,39.37 | 89.15,39.37 v89.15,38.61 | v9.89,64.52 v9.89,65.79 9.89,65.02 11.48,65.02 11.18,65.07 | 69.09,8.38 69.09,8.53 C32.- | 89.15,39.37 C35.- | v87.88,66.8 87.88,69.09 87.38,69.6 C30.- | C6.- 12.14,39.32 12.45,39.62 v12.45,39.88 v12.45,38.86
  other vias: 54.05,27.36 57.05,29.11 55.65,29.06 56.41,26.01 54.13,29.06 47.75,38.86 45.21,41.4 46.74,41.4 48.77,41.4 50.29,41.4 45.21,39.88 46.74,39.88 48.77,39.88 50.29,39.88 50.29,37.85 48.77,37.85 45.21,37.85 45.21,36.32 46.74,36.32 48.77,36.32 50.29,36.32 41.4,68.33 40.13,68.33 38.86,68.33 37.59,68.33 36.32,68.33 35.05,68.33 33.78,68.33 32.51,68.33 32.51,69.6 35.05,70.1 37.59,70.1 40.39,69.6 41.4,69.6 41.4,70.87 40.39,70.87 38.86,71.12 36.32,71.12 33.78,71.12 32.51,70.87 32.51,72.14 35.05,72.39 37.59,72.39 40.39,72.14 41.4,72.14 41.4,73.41 40.39,73.41 38.86,73.66 36.32,73.66 33.78,73.66 32.51,73.41 32.51,74.68 35.05,74.68 37.59,74.68 40.39,74.68 41.4,74.68 41.4,75.95 40.13,75.95 38.86,75.95 37.59,75.95 36.32,75.95 35.05,75.95 33.78,75.95 32.51,75.95 32.51,77.22 33.78,77.22 35.05,77.22 36.32,77.22 37.59,77.22 38.86,77.22 40.13,77.22 41.4,77.22 39.62,66.8 39.88,65.02 39.88,63.75 39.88,62.48 38.61,63.25 39.88,59.94 39.12,58.67 38.35,66.8 37.08,66.8 35.81,66.8 34.54,66.8 38.61,61.72 39.88,61.21 37.59,63.25 37.59,61.72 36.58,63.25 36.58,61.72 53.34,75.31 53.34,72.52 52.58,73.41 52.58,74.42 47.75,72.14 47.75,73.15 51.05,73.66 49.53,73.66 56.24,81.89 52.83,76.96 52.32,80.77 52.83,78.99 54.36,80.77 56.13,80.26 56.13,78.49 56.39,55.88 55.37,55.37 38.1,58.67 37.08,58.67 36.07,58.67 35.31,59.94 33.78,59.94 33.78,61.21 35.31,61.21 35.31,62.48 35.31,63.75 35.31,65.02 33.78,65.02 33.78,63.75 33.78,62.48 25.15,55.37 23.88,56.64 35.81,78.74 35.81,80.26 35.81,81.79 87.88,67.82
  pour Route2: 0,48.01 0,49.02 arc-180 95.5,49.02 95.5,48.01 arc-180
  pour Top (rank 5, no thermals): 56.13,54.86 24.13,54.86 23.37,55.63 23.37,71.37 26.42,74.68 23.37,77.72 28.96,82.04 41.4,86.61 50.29,86.61 50.29,90.42 52.83,90.42 53.09,88.39 56.64,84.33 56.64,55.63
  pour Top: 52.81,25.73 58.37,25.73 58.67,25.91 58.67,30.23 54.36,30.23 52.83,28.45
J7
  Top 0.254: 48.77,47.24 49.07,47.55 49.07,47.75
  Top 0.279: U3.56 48,46.48 48.77,47.24
  Top 0.508: 49.07,47.75 51.54,50.22 70.08,50.22 77.8,57.94 77.8,70.12 J7.D+
N$1
  Top 0.203: U3.25 48,33.28 48.01,31.75 48.01,31.24 | C20.1 48.01,31.12 48.01,31.1
  Top 0.254: C22.1 48.02,31.13 48.01,31.12 | C20.1 48.01,31.24
N$2
  Top 0.203: U3.45 57.37,41.11 57.91,41.66 57.91,42.67 58.93,43.69 R22.2
N$3
  Top 0.254: U3.62 45,46.18 43.69,47.5 43.69,48.75 C18.1 C17.1
N$4  (via drill 0.36)
  Top 0.203: U3.43 59.53,40.11 | 59.53,40.11 R23.2 C29.1 | 59.53,40.11 59.53,38.52 SJ1.2
  Top 0.254: 59.53,38.52 59.35,38.52 v58.93,38.35
  Bottom 0.254: TP1.P$1 59.18,38.61 v58.93,38.35
N$5
  Top 0.254: U3.60 46,46.71 44.96,47.75 44.96,51.2 R19.2 43.69,53.45 C15.1 40.31,53.59 Y1.P$1
N$6
  Top 0.254: U3.61 45.49,43.42 45.49,46.46 44.45,47.5 44.45,50.91 R19.1 32.73,51.17 | 32.73,51.17 Y1.P$2 | C16.2 33.16,50.73 32.73,51.17
N$7
  Top 0.254: U6.4 83.06,29.59 R30.2
N$8
  Top 0.203: R18.2 R17.2 69.23,42.02 SJ2.1
N$9
  Top 0.254: 41.91,43.94 41.91,45.72 41.48,46.15 41.33,46.15
  Top 0.279: U3.1 42.73,42.61 41.91,43.43 41.91,43.94
  Top 0.508: 41.33,46.15 30.51,46.15 21.77,54.89 21.77,72.69 22.78,73.71 22.88,73.71 23.29,74.12 arc94 23.24,75.74 arc41 22.5,76.02 21.39,76.02 J1.D-
N$10
  Top 0.203: U3.44 57.88,40.61 58.67,41.4 58.67,42.16 59.18,42.67 64.52,42.67 65.02,42.67 SJ2.2
N$11  (via drill 0.51, 0.66)
  Top 0.203: R17.1 71.74,43.32 72.64,42.42 C10.2
  Top 0.254: R17.1 v69.85,43.18 | J0.1 67.16,86.52 67.31,86.36
  Top 1.016: v67.82,84.58 67.82,86.11 67.56,86.11 67.31,86.36
  Top 1.422: v60.45,86.61 F1.1
  Route15 1.016: v67.82,84.58 62.48,84.58 v60.45,86.61
  Bottom 0.254: v69.85,43.18 70.1,43.43 70.1,62.23 65.53,66.8 65.53,82.3 v67.82,84.58 | TP4.P$1 v60.45,86.61
N$12
  Top 0.254: U3.63 44.5,45.92 42.42,48.01 41.4,48.01 41.19,48.21 R14.1
N$13
  Top 0.254: 41.4,43.69 41.4,45.21 41.15,45.47 40.97,45.47
  Top 0.279: U3.2 42.47,42.11 41.4,43.18 41.4,43.69
  Top 0.508: 40.97,45.47 30.23,45.47 21.08,54.61 21.08,73.02 22.5,74.44 J1.D+
N$14  (via drill 0.36, 0.51)
  Top 0.254: U3.50 51,43.89 51.31,44.2 51.82,44.2 v52.15,43.99 | v16.26,72.9 15.3,72.9 R2.2
  Bottom 0.254: v16.26,72.9 32.51,56.64 46.23,56.64 52.07,50.8 52.07,44.07 v52.15,43.99
N$15  (via drill 0.36, 0.51)
  Top 0.254: U3.51 50.5,44.15 51.05,44.7 54.1,44.7 v54.36,44.45 | v17.53,72.9 17.53,72.14 16.51,71.12 15.22,71.12 R1.1
  Bottom 0.254: v54.36,44.45 54.36,50.04 46.99,57.4 32.77,57.4 17.53,72.64 v17.53,72.9
N$16
  Top 0.254: R1.2 12.97,71.17 LED1.3
N$17
  Top 0.254: LED1.2 12.17,74.47 R2.1
N$18  (via drill 0.36)
  Top 0.203: U3.28 49.5,33.45 51.82,31.14 v51.82,29.97
  Top 0.254: U1.2 13.97,54.07 v13.97,52.58
  Bottom 0.254: v51.82,29.97 49.53,29.97 49.28,29.72 49.28,28.96 48.51,28.19 47.75,28.19 47.24,28.7 35.05,28.7 20.57,43.18 20.57,48.26 19.3,49.53 17.02,49.53 16.26,50.29 | 16.26,50.29 v13.97,52.58 | TP7.P$1 16.26,50.29
N$19  (via drill 0.36)
  Top 0.203: U3.29 50,33.62 52.58,31.04 v52.58,30.73
  Top 0.254: R40.2 12.56,52.44 v12.7,52.58
  Bottom 0.254: v12.7,52.58 12.7,53.09 12.95,53.34 17.53,53.34 22.1,48.77 22.1,43.69 35.56,30.23 46.48,30.23 48.03,31.77 51.84,31.77 52.58,31.04 v52.58,30.73
N$20  (via drill 0.61)
  Top 0.254: 17.48,70.06 11.52,70.06 LED9.A
  Top 0.406: 17.48,64.72 17.53,64.72 C7.+
  Top 1.016: 11.68,59.44 11.68,61.47 13.46,63.25 16,63.25 17.48,64.72 17.48,70.06 v17.53,70.1 18.29,70.1 19.3,71.12 19.3,77.22 19.32,77.23 J1.VBUS
  Bottom 0.254: TP8.P$1 16.51,69.09 v17.53,70.1
  pour Top: 13.46,58.93 13.46,60.2 12.7,60.96 11.68,60.96 11.68,58.93
N$21  (via drill 0.36)
  Top 0.203: U3.26 48.5,33.13 50.29,31.34 v50.29,29.21
  Top 0.254: R41.1 18.29,49.28 v17.78,48.77
  Bottom 0.254: v17.78,48.77 19.05,48.77 19.81,48.01 19.81,42.93 34.8,27.94 46.74,27.94 47.24,27.43 49.02,27.43 50.29,28.7 v50.29,29.21
N$22  (via drill 0.36)
  Top 0.203: U3.27 49,33.29 51.05,31.24 v51.05,30.73
  Top 0.254: U1.3 15.24,54.07 v15.24,52.58
  Bottom 0.254: 17.02,50.8 17.53,50.29 19.56,50.29 21.34,48.51 21.34,43.43 35.31,29.46 46.99,29.46 48.26,30.73 v51.05,30.73 | 17.02,50.8 v15.24,52.58 | TP9.P$1 17.02,50.8
N$23
  Top 0.254: U3.3 41.7,41.61 40.13,43.18 39.88,43.1
  Top 0.508: 39.88,43.1 12.73,43.1 11.35,44.48 11.35,48.26 11.79,48.69 11.79,49.17 arc90 10.74,50.22 10.67,50.22 arc62 9.65,49.61 J2.D-
N$24
  Top 0.254: U3.4 41.44,41.11 40.13,42.42 39.88,42.42
  Top 0.508: 39.88,42.42 12.45,42.42 10.67,44.2 J2.D+
N$25  (via drill 0.51, 0.66)
  Top 0.254: 16.1,58.06 16.31,58.06 16.64,58.4 U1.5 | LED11.A 3.82,54.88 v4.32,55.27
  Top 0.508: 16.76,57.91 16.51,57.91 16.26,58.17
  Top 1.016: 16.1,58.06 17.42,58.06 17.48,58.12 18.75,58.12 v18.8,58.17 | C6.+ 4.9,42.5 6.1,43.69 6.1,49.02 J2.VBUS
  Bottom 0.254: v4.32,55.27 6.07,55.27 6.17,55.37 | TP10.P$1 v18.8,58.17
  Bottom 1.016: J2.VBUS 6.17,55.37 6.17,55.96 8.38,58.17 v18.8,58.17
  pour Top: 17.78,58.17 17.78,60.2 17.02,60.96 16,60.96 16,58.17
N$26
  Top 0.254: R3.2 5.08,51.82 2.79,49.53 2.06,49.53 LED2.3
N$27  (via drill 0.36, 0.51)
  Top 0.254: U3.48 53.03,42.61 v53.34,42.9 | v7.87,54.61 7.87,53.45 R4.2
  Bottom 0.254: 53.32,42.93 v53.34,42.9 53.32,42.9 53.04,42.62 51.28,42.62 49.96,43.94 44.45,43.94 43.43,42.93 34.54,42.93 22.35,55.12 8.38,55.12 v7.87,54.61
N$28  (via drill 0.36, 0.51)
  Top 0.254: U3.49 51.51,43.31 52.56,43.31 53.19,43.94 v53.34,43.94 | v9.4,56.64 9.4,53.2 R3.1
  Bottom 0.254: v53.34,43.94 53.19,43.94 52.55,43.31 51.56,43.31 50.16,44.7 34.8,44.7 22.35,56.64 v9.4,56.64
N$29
  Top 0.254: R4.1 6.1,53.34 5.33,52.58 3.95,52.58 LED2.2
N$30
  Top 0.254: U3.53 49.5,44.68 51.05,46.23 51.31,46.23
  Top 0.508: 51.31,46.23 51.56,46.48 72.39,46.48 77.98,52.07 81.79,52.07 83.82,50.04 83.82,46.99 83.74,46.91 83.74,46.41 arc90 84.84,45.31 arc58 85.78,45.85 86.34,46.41 J6.D-
N$31
  Top 0.254: U3.6 39.86,40.11 39.62,39.88 39.45,39.88
  Top 0.508: 39.45,39.88 35.05,39.88 19.91,24.74 19.91,23.47 19.3,22.86 19.3,21.21 J3.D-
N$32
  Top 0.254: U3.7 40.12,39.61 39.7,39.19 39.57,39.19
  Top 0.508: 39.57,39.19 35.33,39.19 20.59,24.46 J3.D+
N$33  (via drill 0.36)
  Top 0.203: U3.34 52.78,35.61 55.37,33.02 56.39,33.02 56.64,32.77 56.64,31.75 55.63,30.73 53.85,30.73 52.07,28.96 51.56,28.96 v51.05,28.45
  Top 0.254: R6.2 17.02,24.38 17.02,24.89 v22.35,30.23
  Bottom 0.254: v22.35,30.23 31.24,30.23 35.05,26.42 42.42,26.42 43.18,27.18 46.23,27.18 46.74,26.67 49.28,26.67 v51.05,28.45
N$34  (via drill 0.36)
  Top 0.254: U3.47 53.8,42.11 v54.46,42.85 | 32,39.62 v32,39.88 32,38.86 18.03,24.89 18.03,23.37 R5.1
  Bottom 0.254: v32,39.88 34.29,42.16 43.94,42.16 44.96,43.18 49.53,43.18 50.8,41.91 53.59,41.91 54.46,42.77 v54.46,42.85
N$35
  Top 0.254: R5.2 15.49,20.83 15.49,18.1 LED3.3
N$36
  Top 0.254: R6.1 14.48,21.84 14.48,19.56 LED3.2
N$37
  Top 0.254: LED11.C 3.93,56.38 | 4.06,56.39 4.05,56.38 3.93,56.38 | 3.93,56.38 R12.1
N$38
  Top 0.254: U3.8 40.89,39.12 38.86,37.08 38.35,37.08
  Top 0.508: 38.35,37.08 36.58,37.08 32.51,33.02 32.51,23.11 36.58,19.05 42.42,19.05 43.94,17.53 43.94,12.14 45.29,10.8 45.29,9.75 J4.D-
N$39
  Top 0.254: U3.9 41.15,38.61 38.86,36.32 38.35,36.4
  Top 0.508: 38.35,36.4 36.86,36.4 33.2,32.74 33.2,23.39 36.86,19.74 42.7,19.74 44.63,17.8 44.63,12.45 J4.D+
N$40  (via drill 0.51)
  Top 0.254: LED12.A 40.74,2.65 40.74,12.34 39.12,13.97 39.12,14.48 39.13,14.49 C8.+
  Top 1.016: 39.12,15.7 39.12,14.53 C8.+ | 39.12,15.7 32.05,15.7 30.73,17.02 30.73,18.03 | 39.12,15.7 40.08,15.7 v40.64,16.26 v41.66,16.26
  Route15 1.016: v40.64,16.26 42.42,16.26 42.42,7.11 43.43,6.1 44.96,6.1 45.03,6.17 J4.VBUS
  Bottom 0.254: TP14.P$1 v40.64,16.26
  pour Top: 30.73,16.26 30.73,18.54 29.97,19.3 29.46,19.3 29.46,16.26
N$41
  Top 0.254: R7.2 45.1,5.19 45.97,4.32 45.97,2.06 LED4.3
N$42  (via drill 0.36, 0.51)
  Top 0.203: U3.32 51.5,34.05 | 51.51,34.04 52.27,33.27 v53.09,33.27
  Top 0.254: 51.5,34.05 51.51,34.04 | v43.69,7.87 R8.2
  Bottom 0.254: v53.09,33.27 53.34,33.02 53.34,30.48 51.82,28.96 51.82,27.94 49.53,25.65 48.77,25.65 43.69,20.57 v43.69,7.87
N$43  (via drill 0.36, 0.51)
  Top 0.203: v54.1,33.02 54.1,33.31 U3.33
  Top 0.254: R7.1 43.94,6.86 v44.96,7.87
  Bottom 0.254: v54.1,33.02 54.1,30.23 52.58,28.7 52.58,27.43 49.78,24.64 49.02,24.64 44.96,20.57 v44.96,7.87
N$44
  Top 0.254: R8.1 42.56,5.19 44.2,3.56 LED4.2
N$45  (via drill 0.36)
  Top 0.203: U3.22 46.5,33.07 45.21,31.77 v45.21,26.16 | U2.2 27.05,10.8 v27.18,10.67
  Bottom 0.203: v27.18,10.67 27.18,10.16 27.94,9.4 30.48,9.4 31.24,10.16 31.24,14.99
  Bottom 0.254: 31.24,14.99 40.13,23.88 44.45,23.88 45.14,24.56 45.14,25.88 v45.21,26.16 45.03,25.98 | TP11.P$1 26.92,10.92 v27.18,10.67
N$46  (via drill 0.36)
  Top 0.203: U3.23 47,32.98 45.9,31.88 v45.9,25.1 | 25.78,10.8 v25.91,10.67
  Top 0.254: R43.2 25.8,10.78 v25.91,10.67
  Bottom 0.203: v25.91,10.67 25.91,9.91 26.92,8.89 30.73,8.89 32,10.16 32,14.48
  Bottom 0.254: 32,14.48 40.39,22.86 44.7,22.86 45.9,24.08 v45.9,25.1
N$47
  Top 2.184: D3.A 55.77,86.98 54.49,88.26 JP1.2
N$48  (via drill 0.36)
  Top 0.203: U3.21 46,33.15 44.45,31.6 44.45,25.27 v44.32,25.15 | U2.3 28.32,10.8 v28.45,10.67
  Bottom 0.203: v28.45,10.67 28.45,10.41 28.96,9.91 30.23,9.91 30.48,10.16 30.48,15.49
  Bottom 0.254: 30.48,15.49 39.88,24.89 43.94,24.89 44.2,25.15 v44.32,25.15 | TP12.P$1 v28.45,10.67
N$49
  Top 0.254: 39.01,33.71 39.37,33.71 40.13,34.47 40.13,36.07 41.68,37.61 U3.11
  Top 0.508: 39.01,33.71 37.52,33.71 35.81,32 35.81,24.38 37.85,22.35 51.82,22.35 55.12,19.05 74.34,19.05 J5.D-
N$50
  Top 0.254: U3.12 41.94,37.11 40.64,35.81 40.64,34.04 39.62,33.02 39.12,33.02
  Top 0.508: 39.12,33.02 37.8,33.02 36.5,31.73 36.5,24.66 38.12,23.04 52.1,23.04 55.4,19.74 72.15,19.74 J5.D+
N$51  (via drill 0.36, 0.51)
  Top 0.203: U3.18 44.5,33.4 42.42,31.32 42.42,25.65 43.69,24.38 v50.8,24.38
  Top 0.254: R36.2 71.93,15.19 v71.37,15.75
  Bottom 0.254: v50.8,24.38 57.66,17.53 69.6,17.53 v71.37,15.75
N$52  (via drill 0.36, 0.51)
  Top 0.203: U3.31 51,33.94 52.68,32.26 v55.88,32.26
  Top 0.254: v72.39,16.51 73.41,16.51 R37.1
  Bottom 0.254: v72.39,16.51 56.9,32.26 v55.88,32.26
N$53
  Top 0.254: R37.2 77.61,15.29 LED5.3
N$54
  Top 0.254: R36.1 76.15,14.27 LED5.2
N$55  (via drill 0.61)
  Top 0.254: LED13.A 74.65,10.69 72.39,12.95 64.52,12.95 | U6.8 77.56,24.73 77.47,24.64
  Top 1.016: v61.21,14.99 v62.48,16.26 61.98,15.75 61.98,15.49 62.13,15.49 C32.+ 64.52,13.1 64.52,12.95 | 78.49,24.38 78.74,24.64 77.47,24.64 77.72,24.38 77.72,18.8 76.34,17.42 J5.VBUS
  Route15 1.016: v61.21,14.99 v62.48,16.26 69.09,16.26 71.63,18.8 72.64,18.8 74.17,17.27 76.04,17.27 J5.VBUS
  Bottom 0.254: TP16.P$1 v61.21,14.99
  pour Top: 78.99,26.16 76.71,26.16 75.95,25.4 75.95,24.89 78.99,24.89
N$56
  Top 0.254: U3.54 49,44.94 50.8,46.74
  Top 0.508: 50.8,46.74 51.23,47.17 72.09,47.17 77.67,52.76 82.07,52.76 84.51,50.32 84.51,46.74 J6.D+
N$57  (via drill 0.36, 0.51)
  Top 0.203: 42.99,35.11 42.67,34.8 42.67,34.29 v42.93,34.04
  Top 0.254: U3.16 42.99,35.11 | v75.44,44.96 74.17,44.96 73.66,44.45 66.04,44.45 65.28,43.69 v63.75,43.69 | R33.2 v87.88,42.16
  Bottom 0.254: v87.88,42.16 81.28,42.16 78.49,44.96 v75.44,44.96 | v63.75,43.69 63.75,44.96 62.74,45.97 61.72,45.97 60.96,45.21 60.96,44.45 57.4,40.89 54.86,40.89 52.58,38.61 52.58,37.08 51.05,35.56 44.45,35.56 v42.93,34.04
N$58  (via drill 0.36, 0.51)
  Top 0.203: U3.17 44,33.59 v43.38,33.22
  Top 0.254: v75.44,45.97 73.91,45.97 73.15,45.21 62.74,45.21 v62.23,44.96 | v85.6,44.2 R34.1
  Bottom 0.254: v85.6,44.2 80.77,44.2 78.99,45.97 v75.44,45.97 | v62.23,44.96 62.23,44.7 57.66,40.13 55.12,40.13 53.34,38.35 53.34,36.83 51.31,34.8 44.96,34.8 v43.38,33.22
N$59
  Top 0.254: LED6.3 92.43,45.95 90.68,44.2 R34.2
N$60
  Top 0.254: LED6.2 92.2,44.2 90.42,42.67 90.42,42.28 R33.1
N$61  (via drill 0.51, 0.61)
  Top 0.254: LED16.A 93.46,41.15 84.07,41.15 82.3,39.37 C35.+ | U7.8 85.44,54.7 85.34,54.61
  Top 1.016: v86.11,54.1 v84.58,54.1 84.07,54.61 85.34,54.61 86.44,54.61 86.56,54.74 | C35.+ 79.5,39.37 79.25,39.62 v79.25,40.13 v79.25,38.86
  Route15 1.016: v84.58,54.1 v86.11,54.1 87.63,52.58 87.63,48.26 89.33,46.56 J6.VBUS 89.33,45.64 85.6,41.91 80.26,41.91 79.25,40.89 v79.25,38.86
  Bottom 0.254: TP19.P$1 84.07,54.1 v84.58,54.1
  pour Top: 86.87,55.88 84.58,55.88 83.82,55.12 83.82,54.86 86.87,54.86
N$62
  Top 0.254: 48.5,44.44 48.5,46.22 49.78,47.5
  Top 0.279: U3.55 48.5,44.44
  Top 0.508: 49.78,47.5 51.82,49.53 70.36,49.53 78.49,57.66 78.49,70.43 76.35,72.57 J7.D-
N$63
  Bottom 1.016: J8.3 36.58,83.82 37.34,84.07 39.12,82.55 41.4,83.31 J9.3
N$64  (via drill 0.61)
  Top 0.254: U7.5 85.44,60.36 85.34,60.45 | LED17.A 81.7,71.84 81.7,69.97 C30.+
  Top 1.016: 85.6,60.71 84.84,60.71 85.25,60.8 80.43,64.86 80.26,65.02 v80.26,67.31 | 86.61,60.71 85.6,60.71 | 85.6,60.71 85.34,60.45 | v80.26,67.31 80.26,67.82 81.32,68.87 C30.+ | v80.26,66.04 v80.26,67.31
  Route15 1.016: J7.VBUS 78.09,76.09 80.26,73.91 v80.26,66.04
  Bottom 0.254: TP20.P$1 v80.26,66.04
  pour Top: 86.87,60.2 84.58,60.2 83.82,59.44 83.82,58.93 86.87,58.93
N$65
  Top 0.254: R32.2 79.96,77.36 LED7.3
N$66  (via drill 0.36, 0.51)
  Top 0.203: U3.14 42.46,36.11 41.66,35.31 41.66,32.26 v41.81,32.11
  Top 0.254: v72.14,55.88 71.63,55.88 69.34,53.59 v69.34,52.07 | v78.99,71.88 R31.2
  Bottom 0.254: v78.99,71.88 73.15,65.53 73.15,56.9 v72.14,55.88 | v41.81,32.11 41.81,31.85 43.18,30.99 43.94,30.99 46.23,33.27 51.82,33.27 54.86,36.32 54.86,37.85 55.63,38.61 58.17,38.61 61.72,42.16 64.52,42.16 69.34,46.99 v69.34,52.07
N$67  (via drill 0.36, 0.51)
  Top 0.203: U3.15 42.72,35.61 42.16,35.05 42.16,33.27 v42.42,33.02
  Top 0.254: v72.14,57.66 71.63,57.66 68.33,54.36 v68.33,52.07 | v78.23,73.15 R32.1
  Bottom 0.254: v72.14,57.66 72.14,67.06 77.72,72.39 v78.23,73.15 | v42.42,33.02 42.42,32.77 43.18,32.26 43.69,32.26 45.47,34.04 51.56,34.04 54.1,36.58 54.1,38.1 55.37,39.37 57.91,39.37 61.47,42.93 64.26,42.93 68.33,46.99 v68.33,52.07
N$68
  Top 0.254: R31.1 80.98,75.9 LED7.2
N$69  (via drill 0.36)
  Top 0.203: U3.35 53.55,36.11 55.63,34.04 v55.63,33.78
  Top 0.254: U6.2 83.09,27.18 v84.58,27.18
  Bottom 0.203: v55.63,33.78 58.17,33.78 59.69,32.26
  Bottom 0.254: 59.69,32.26 75.44,32.26 80.52,27.18 v84.58,27.18 86.11,25.65 TP15.P$1
N$70  (via drill 0.36)
  Top 0.203: U3.30 50.5,33.77 52.78,31.5 v54.86,31.5
  Top 0.254: v84.58,25.65 84.58,24.24 R47.2
  Bottom 0.254: v54.86,31.5 54.86,32.77 55.12,33.02 57.4,33.02 59.18,31.24 74.93,31.24 80.52,25.65 v84.58,25.65
N$71  (via drill 0.36)
  Top 0.203: U3.38 52.32,37.59 54.86,37.59 v55.88,36.58 | 90.97,56.64 U7.2
  Top 0.254: U7.2 91.57,56.77 92.2,56.13 92.2,54.1 v91.69,53.59
  Bottom 0.203: v91.69,53.59 90.42,52.32 82.55,52.32 82.04,52.83 77.72,52.83 72.64,47.75 72.64,39.12 70.1,36.58 v55.88,36.58
  Bottom 0.254: TP17.P$1 v91.69,53.59
N$72  (via drill 0.36)
  Top 0.203: U3.39 52.31,38.1 55.37,38.1 v55.88,37.59
  Top 0.254: R49.2 89.92,52.83 v90.68,53.59
  Bottom 0.203: v55.88,37.59 69.85,37.59 71.88,39.62 71.88,48.01 77.47,53.59 82.3,53.59 82.8,53.09 90.42,53.09 v90.68,53.59
N$74  (via drill 0.36)
  Top 0.203: U3.37 52.33,37.08 54.36,37.08 v55.88,35.56 | 90.97,57.91 U7.3
  Top 0.254: U7.3 91.82,58.04 92.96,56.9 92.96,53.85 v91.69,52.58
  Bottom 0.203: v55.88,35.56 70.36,35.56 73.41,38.61 73.41,47.5 77.98,52.07 81.53,52.07 82.04,51.56 90.68,51.56 v91.69,52.58
  Bottom 0.254: TP18.P$1 v91.69,52.58
N$75  (via drill 0.36)
  Top 0.203: U3.13 42.2,36.61 41.15,35.56 41.15,30.88 R16.2 R15.1
  Top 0.254: R15.1 38.86,30.48 v39.62,31.24
  Bottom 0.254: TP6.P$1 39.12,32 v39.62,31.24
N$76  (via drill 0.36, 0.51)
  Top 0.203: R26.2 R27.1 62.57,38.58 R24.1
  Top 0.254: R26.2 63.61,41.39 v63.6,41.4 | LED14.A v70.61,85.85
  Bottom 0.254: 63.75,41.4 69.6,41.4 71.12,42.93 71.12,62.99 66.55,67.56 66.55,80.26 v70.61,85.85 | 63.75,41.4 v63.6,41.4 | TP5.P$1 64.26,40.89 63.75,41.4
N$77
  Top 0.203: U3.42 56.4,39.61 58.42,37.59 R24.2
N$78
  Top 0.203: U3.41 56.14,39.11 58.42,36.83 59.94,36.83 61.47,35.31 61.47,33.27 62.1,32.64 IC2.6 65.41,32.64 69.85,37.08 72.14,37.08 73.91,38.86 73.91,39.74 R25.1 75.07,40.89 J10.2
N$79
  Top 0.203: R28.1 74.81,38.61 74.68,38.61 | U3.40 55.88,38.61 58.42,36.07 59.69,36.07 60.71,35.05 60.71,32.51 61.85,31.37 IC2.5 65.41,31.37 70.1,36.07 72.14,36.07 74.56,38.5 R28.1 | J10.3 75.07,38.35 R28.1
N$80
  Top 1.016: J8.2 26.67,85.6 32.26,87.88 35.05,86.61 J9.2
N$81
  Top 0.254: U1.1 12.37,53.74 R40.1 R39.1
N$82
  Top 0.406: IC1.3 47.64,71.12 C3.1
N$83
  Bottom 1.016: J8.4 23.67,85.85 25.65,85.85 34.04,89.41 J9.4
N$84
  Top 1.016: J8.1 34.29,89.41 42.42,91.19 J9.1
N$85
  Top 0.406: R9.1 59.89,93.1 LED8.C
N$86
  Top 0.254: LED9.C 7.9,71.61 R10.1
N$87  (via drill 0.51)
  Top 0.254: LED10.A 10.71,20.83 11.43,21.08 18.63,28.28 18.63,30.57 20.19,32.13 | U2.8 24.22,17.69 23.88,18.03
  Top 0.406: 18.63,30.57 C9.+
  Top 1.016: 20.45,32.64 v20.07,33.02 20.07,32.26 20.19,32.13 20.32,32 v21.08,32 20.45,32.64 | 20.45,32.38 20.45,32.64 | J3.VBUS 24.62,19.32 24.64,19.3 24.64,17.27 | 24.64,16.76 24.64,17.27 | 24.64,17.27 23.88,18.03 22.86,19.05 23.62,19.05 24.13,18.54
  Route15 1.016: J3.VBUS 17.42,27.07 21.08,30.73 v21.08,32 v20.07,33.02
  Bottom 0.254: TP13.P$1 16,20.73 J3.VBUS
  pour Top: 26.16,16.26 26.16,18.54 25.91,19.3 24.89,19.3 24.89,16.26
N$88
  Top 0.254: LED10.C 10.42,22.91 R11.1
N$89
  Top 0.406: C27.1 C24.2
N$90
  Top 0.254: LED12.C 39.12,2.55 R13.1
N$91
  Top 0.254: LED17.C 83.82,71.84 83.82,66.55 83.42,66.15 R29.1
N$92
  Top 0.254: LED16.C 93.71,39.37 R21.1
N$93
  Top 0.254: LED13.C 73.59,9.63 R20.1
N$94
  Top 0.305: J0.4 65.53,87.88 65.79,88.39 67.31,88.39 69.34,86.36 69.34,85.34 71.37,83.31 74.49,83.31 R35B.P$1
  Top 0.406: R35.1 71.43,77.78 R35B.P$1
N$95
  Top 0.254: U1.4 17.1,53.74 R41.2 R42.2
N$96
  Top 0.254: U2.1 25.58,12.08 R43.1 R44.1
N$97  (via drill 0.36)
  Top 0.203: v43.69,26.16 43.69,31.42 45.5,33.23 U3.20 | 29.59,10.8 v29.72,10.67
  Top 0.254: R45.1 29.83,10.78 v29.72,10.67
  Bottom 0.203: v29.72,10.67 29.72,16
  Bottom 0.254: 29.72,16 39.37,25.65 43.18,25.65 v43.69,26.16
N$98
  Top 0.254: U6.1 82.92,25.73 R47.1 R48.1
N$99
  Top 0.203: R49.1 R50.1
  Top 0.254: U7.1 90.84,54.77 90.42,54.36 88.9,54.36 88.25,53.71 R49.1
N$100  (via drill 0.36)
  Top 0.203: v56.39,34.54 55.88,34.54 53.85,36.58 52.34,36.58 U3.36
  Top 0.254: v92.71,52.58 91.95,51.82 89.8,51.82 R51.1
  Bottom 0.203: v56.39,34.54 70.61,34.54 74.17,38.1 74.17,47.24 78.23,51.31 81.03,51.31 81.53,50.8 90.93,50.8 v92.71,52.58
N$101
  Top 0.203: IC2.7 65.15,33.91 SJ3.2
PE
  Top 0.406: J4.S1 R38.1 C28.1
  Route2 1.27: 78.39,80.17 J7.S1 78.48,80.26 79.63,81.41 | 79.63,81.41 79.76,81.53 arc-45 94.23,49.02 | J6.S1 94.18,49.07 94.23,49.02 | J5.S1 81.53,15.75 | 81.53,15.75 arc45 94.23,49.02 | J4.S1 49.03,1.54 | 49.03,1.54 49.02,1.27 arc45 81.53,15.75 | J3.S1 16,13.72 | 16,13.72 arc44 49.03,1.54 | J2.S1 1.27,46.48 | 1.27,46.48 arc45 16,13.72 | J1.S1 13.97,79.76 arc45 1.27,46.48 | J0.S1 arc-15 79.63,81.41
  Bottom 1.016: 69.18,70.96 J7.S2
  Bottom 1.27: J6.S2 J6.S1 | 69.18,70.96 J7.S1 | J5.S2 J5.S1 | J4.S2 J4.S1 | J3.S2 J3.S1 | J2.S1 J2.S2 | J1.S1 J1.S2 | J0.S2 J0.S1
SW
  Top 0.406: IC1.1 47.89,68.58 C3.2
  pour Top (no thermals): 40.89,57.4 40.89,67.31 42.42,67.31 42.42,68.83 54.36,68.83 54.36,57.4
UP_DM
  Top 0.254: U3.58 47,49.26
  Top 0.406: J0.2 66.22,86.26 66.22,85.75
  Top 0.508: 47,49.26 47,50.05 49.53,52.58 62.48,52.58 66.22,56.31 66.22,85.75
UP_DP
  Top 0.254: U3.59 46.5,48.75 46.3,49.45
  Top 0.406: J0.3 65.53,86.36 65.53,85.75
  Top 0.508: 46.3,49.3 46.3,49.45 46.3,50.32 49.25,53.26 62.21,53.26 65.53,56.59 65.53,85.75

## Text on the board
tNames: K-Board | Rev 0.4 | A.T.
Document: NOTES: | 1. All dimensions are in Inches unless otherwise specified | 2. PCB Outline is circular with 3" diameter | except for marked flat regions on horizontal connector | 3. Finished board thickness 0.058 inches +/- 0.0061" | 4. PCB Construction: 4 layers, see Board Stackup | 5. Soldermask over bare copper, both sides | 6. Silkscreen on TOP side only, clip from solder lands | 7. Minimum Conductor Width/Spacing: 6mil | 8. PCB Material: FR-4 or equivalent | 9. Files are in Gerber 274X format | 10. Impedance to be +/- 10% | 11. Finished PCB Warpage and Twist per IPC-6012 | 12. Layer to layer registration variation +/- 0.005" | 13. Hole size variation +/- 0.004" of the finished drill size | 14. Board outline variation +/- 0.010" of board outline layer | 15. Remove all burrs if present | 16. Solder on shield of J0 (USB Micro) must not be | wicked into the path of the connector | Board Stackup | L1 - TOP: 1.7mil Copper 0.5oz | BOND: 11.9mil FR-4 Er=4.5 | L2 - GND: 1.4mil Copper 1oz | LAM: 28.0mil FR-4 Er=4.5 | L3 - VCC: 1.4mil Copper 1oz | BOND: 11.9mil FR-4 Er=4.5 | L4 - BOT: 1.7mil Copper 0.5oz | Total: 58mil +/- 6.1mil | Revision 0.4 | Bug Labs INC. | www.buglabs.net | ENGR: Andrew Tergis | andrew.tergis@buglabs.net
Reference: USB connectors centered on 3 inch diameter
DrillLegend_01-16: 01-16
DrillLegend_01-20: 01-20